# Altium PCB CircleValve.PcbDoc
Units mm, origin at the board's own origin, x right, y up, seen from the top; angles counter-clockwise.
Board outline 54 x 54 mm, 2 copper layers (Top Layer, Bottom Layer); 53 components, 64 nets, 229 pads, 73 vias.
Unrouted connection lines stored in the file: 1.
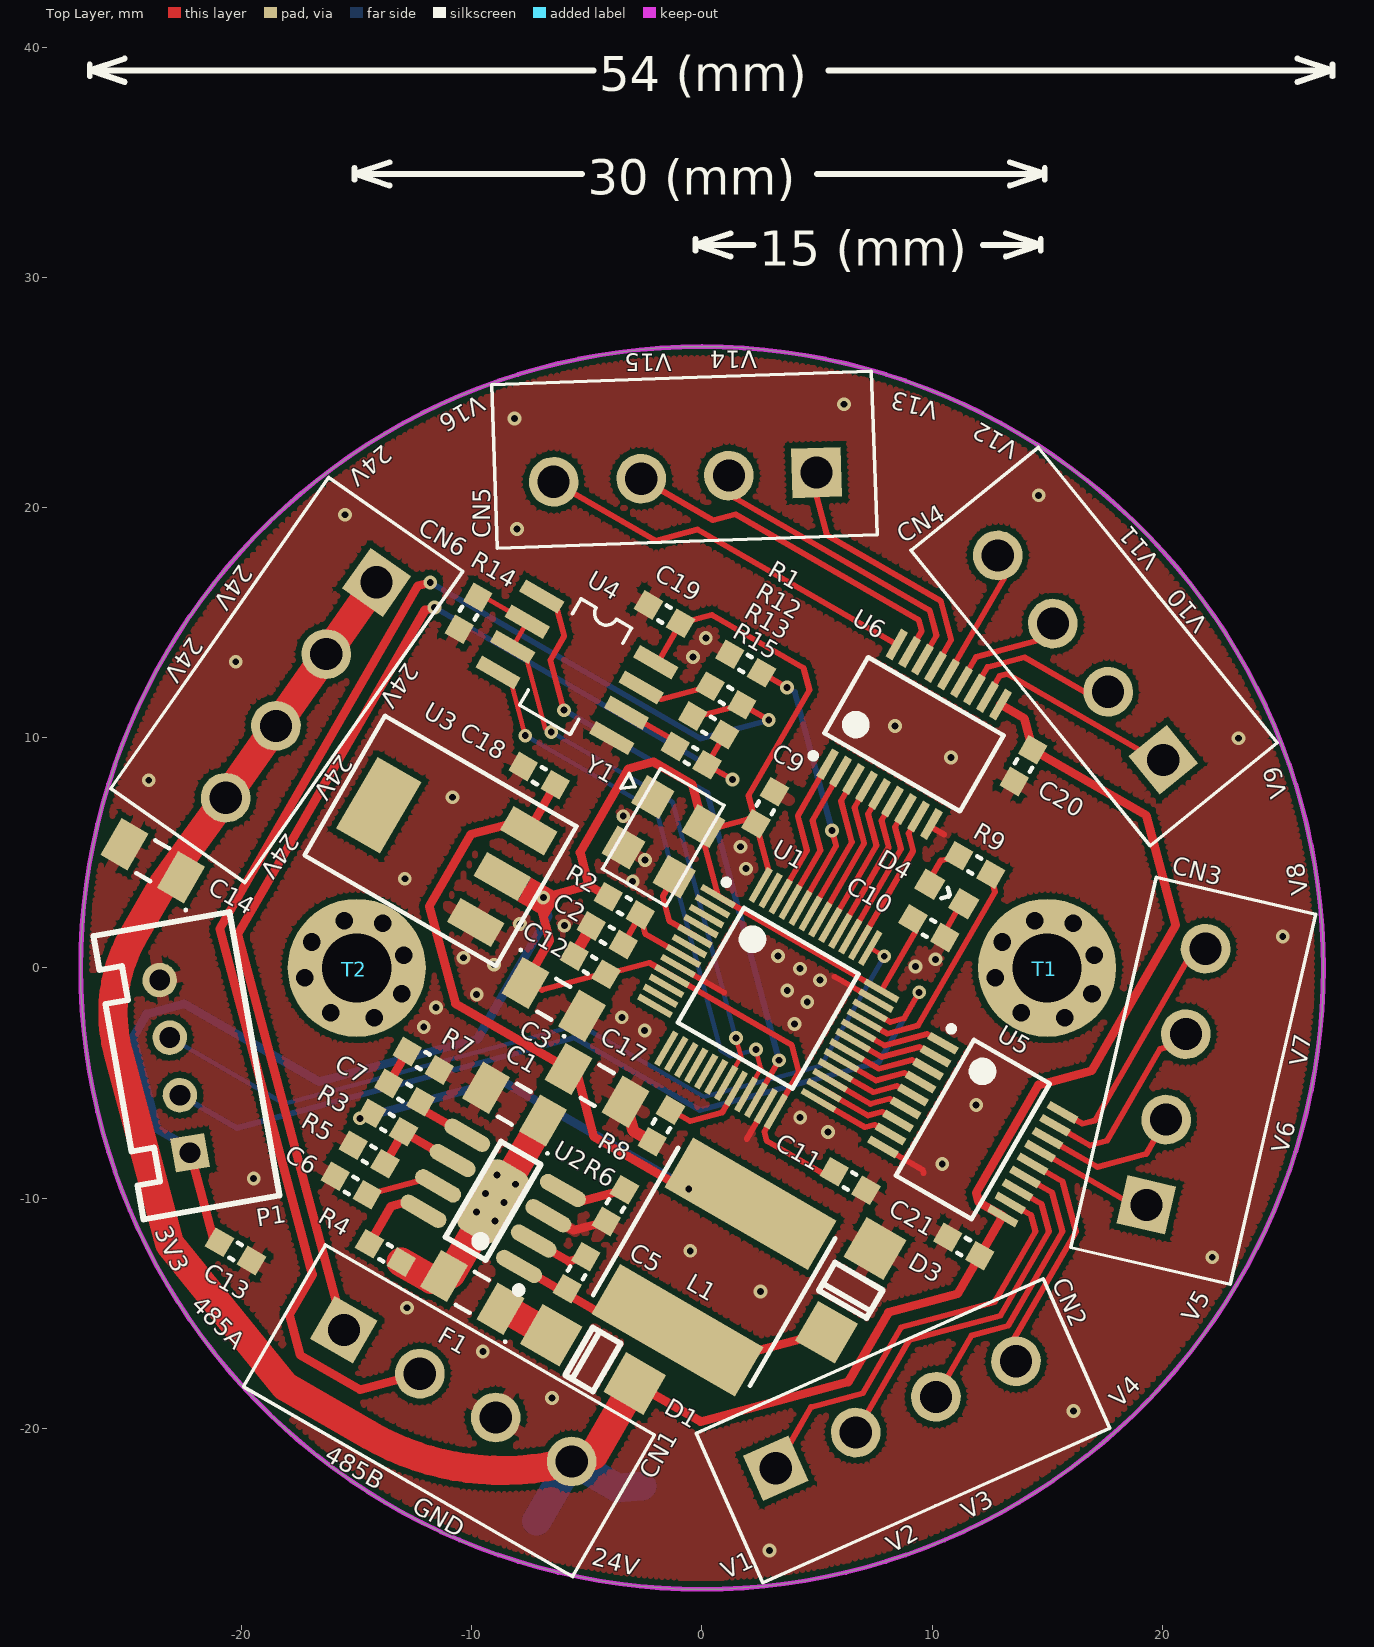
[diagram p0: Top Layer view]
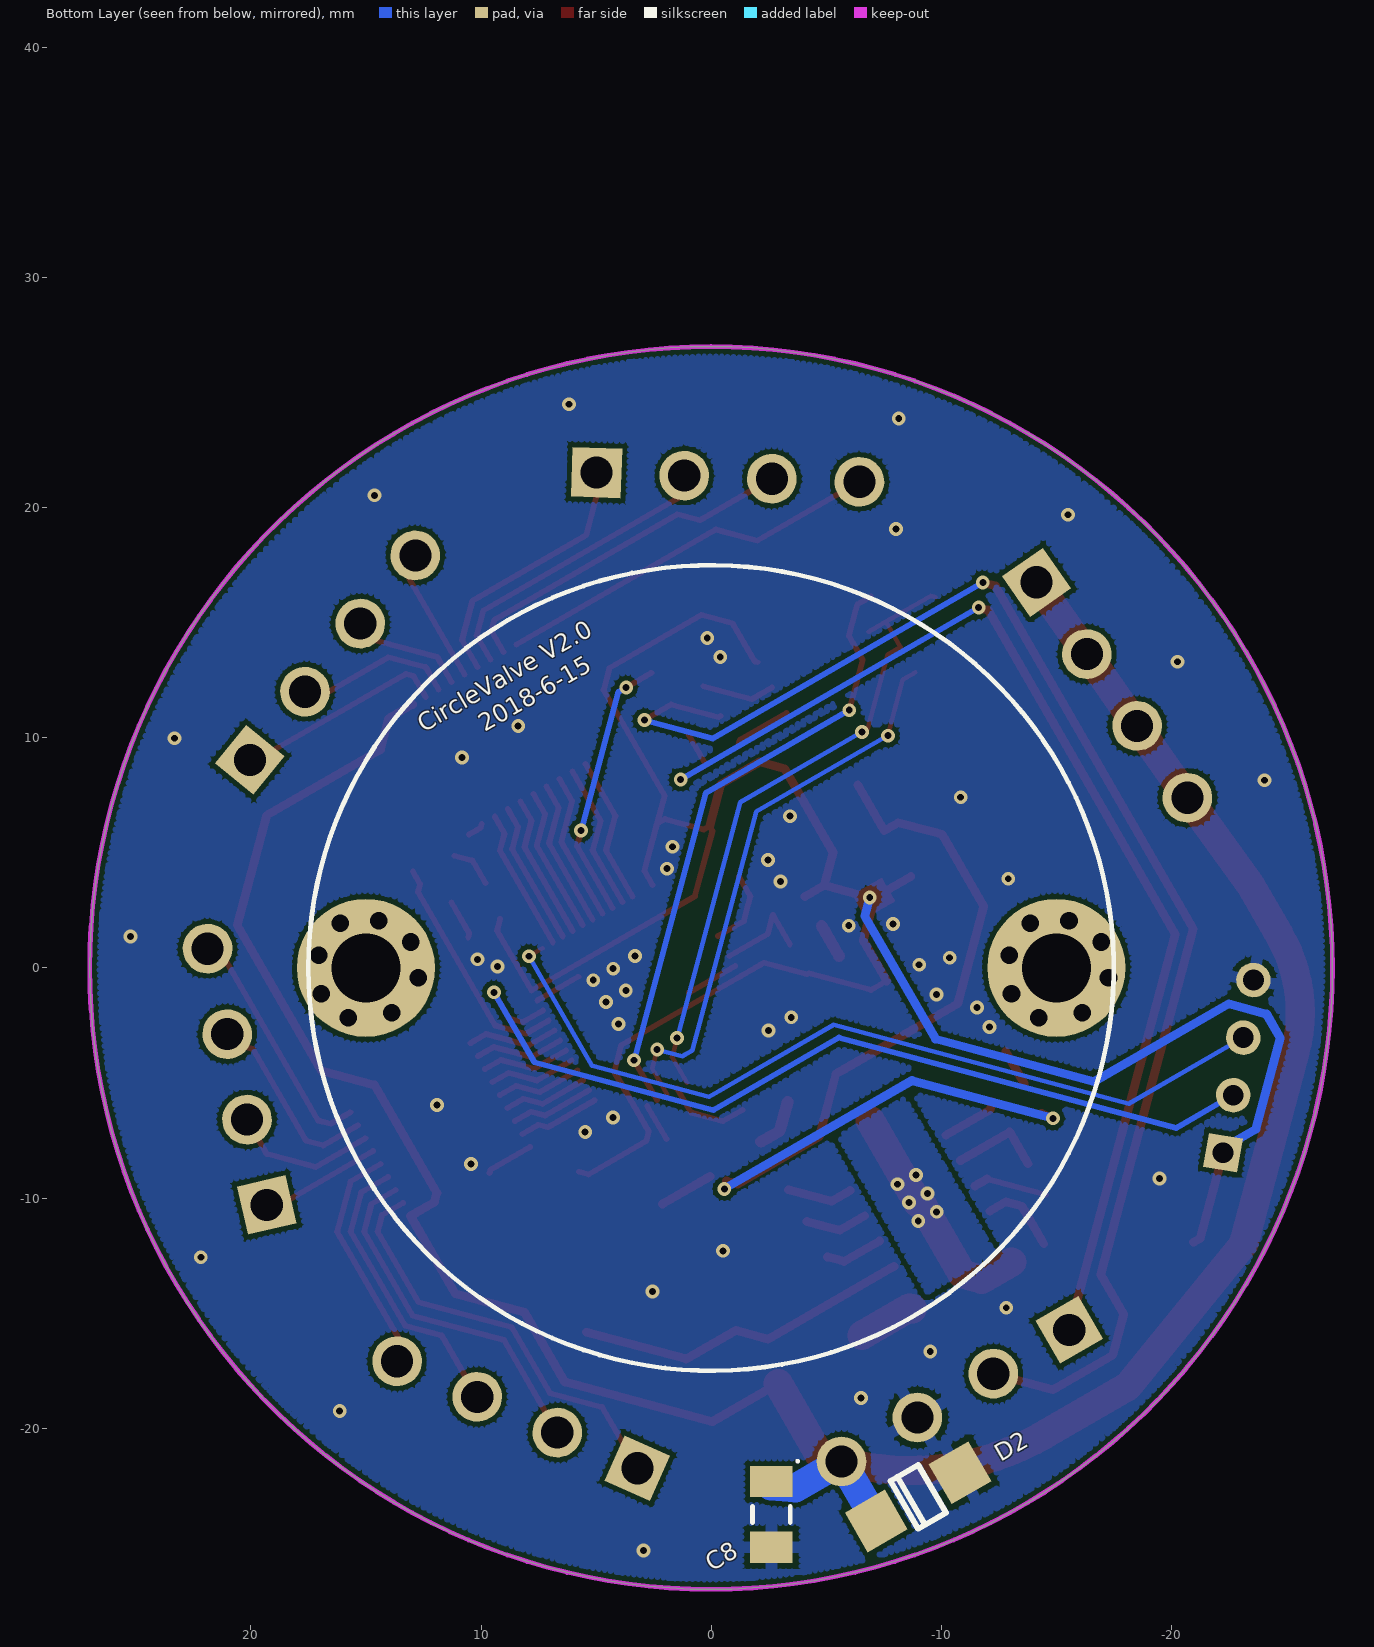
[diagram p1: Bottom Layer view, seen from below]

## Layer stack, top to bottom
Top Layer: signal copper 0.0356
Dielectric: dielectric 0.32, FR-4, Dk 4.8
Bottom Layer: signal copper 0.0356

## Board outline
-26.997,-0.003 ccw(c0.003,-0.003) 0.003,-27.003 ccw(c0.003,-0.003) 27.003,-0.003 ccw(c0.003,-0.003) 0.003,26.997 ccw(c0.003,-0.003)

## Design rules (kind name [scope] priority, off if disabled: settings)
Clearance [All] p1: gap=0.203
ComponentClearance [All] p1 off: gap=0.254 collisioncheckmode=3 verticalgap=0.254 showdistances=FALSE
PlaneConnect [All] p1: planeconnectstyle=Direct reliefexpansion=0.508 reliefentries=4 reliefconductorwidth=0.254 reliefairgap=0.254
PolygonConnect PolygonConnect_1 [isvia] p1: connectstyle=Direct reliefconductorwidth=0.254 reliefentries=4 polygonreliefangle="90 Angle" airgapwidth=0.254
PolygonConnect [All] p2: connectstyle=Relief reliefconductorwidth=0.508 reliefentries=4 polygonreliefangle="90 Angle" airgapwidth=0.254
RoutingVias [All] p1: holewidth=0.711 width=1.27 viastyle="Through Hole" minholewidth=0.711 minwidth=1.27 maxholewidth=0.711 maxwidth=1.27
SolderMaskExpansion [All] p1: expansion=0.102
Width [All] p1: maxlimit=2.54 minlimit=0.152 preferedwidth=0.254
26 further rules are at their usual default settings.

## Classes and differential pairs
component class Power: C1 C3 C5 C6 C7 C8 C14 C17 C18 C19 CN1 D1 D2 D3 F1 L1 R3 R4 R5 R6 R7 U2 U3
component class "Surface V2.0": C20 C21 CN2 CN3 CN4 CN5 CN6 U5 U6
component class CircleValve: C2 C9 C10 C11 C12 C13 D4 P1 R1 R2 R8 R9 R12 R13 R14 R15 T1 T2 U1 U4 Y1

## Components (designator, comment, footprint, x,y, rotation, side; value= is the part's Value field where it differs from the comment)
C1 "10uf 50V" C1206 -8.147,-5.921 r150 top
C2 "100nF" C0603 -4.112,1.42 r150 top
C3 "10uF 16V" C1206 -4.559,-5.106 r330 top
C5 "100nF" C0603 -5.451,-13.251 r240 top
C6 "100nF" C0603 -15.24,-9.456 r150 top
C7 "100nF" C0603 -12.911,-5.422 r150 top
C8 "10uF 50V" C1206 -2.62,-23.748 r270 bottom
C9 "100nF" C0603 2.751,6.955 r240 top
C10 "100nF" C0603 9.862,1.723 r150 top
C11 "100nF" C0603 6.437,-9.26 r150 top
C12 "100nF" C0603 -4.862,0.121 r330 top
C13 "100nF" C0603 -20.269,-12.317 r150 top
C14 "10uF 50V" C1206 -23.865,4.655 r150 top
C17 "10uF 16V" C1206 -6.44,-1.364 r330 top
C18 "100nF" C0603 -7.067,8.351 r330 top
C19 "100nF" C0603 -1.628,15.372 r330 top
C20 "100nF" C0603 13.972,8.791 r60 top
C21 "100nF" C0603 11.373,-12.11 r330 top
CN1 "CON_3.81_4P_DECA_ME040_381" ME040_381_4P_VC-1 -10.61,-18.586 r330 top locked
CN2 "CON_3.81_4P_DECA_ME040_381" ME040_381_4P_VC-1 8.426,-19.415 r24 top locked
CN3 "CON_3.81_4P_DECA_ME040_381" ME040_381_4P_VC-1 20.597,-4.734 r77 top locked
CN4 "CON_3.81_4P_DECA_ME040_381" ME040_381_4P_VC-1 16.448,13.481 r129 top locked
CN5 "CON_3.81_4P_DECA_ME040_381" ME040_381_4P_VC-1 -0.733,21.322 r182 top locked
CN6 "CON_3.81_4P_DECA_ME040_381" ME040_381_4P_VC-1 -17.417,12.075 r235 top locked
D1 "SK54" LC-SMA(DO-214AC)_S3 -4.736,-17.012 r330 top
D2 "SMAJ30CA" LC-SMA(DO-214AC)_S3 -8.993,-22.984 r150 bottom
D3 "SK54" LC-SMA(DO-214AC)_S3 6.465,-14.011 r60 top
D4 "LED" LED_M 10.635,3.212 r330 top
F1 "3A 32V" C1206 -9.982,-14.099 r150 top
L1 "10uH" L_SOP74 -1.065,-15.754 r60 top
P1 "Header 4" Header4-2.54mm -22.241,-8.032 r100 top locked
R1 "10K" R0603 1.823,13.149 r150 top
R2 "10K" R0603 -3.302,2.771 r330 top
R3 "52.3k 1%" R0603 -13.733,-6.795 r150 top
R4 "100k" R0603 -13.683,-12.309 r330 top
R5 "10k 1%" R0603 -14.39,-8.033 r330 top
R6 "200k" R0603 -3.838,-10.256 r60 top
R7 "10k" R0603 -12.183,-4.11 r150 top
R8 "10K" R0603 -1.838,-6.792 r60 top
R9 "1k" R0603 11.781,4.397 r150 top
R12 "4R7" R0603 0.967,11.767 r150 top
R13 "120R" R0603 0.361,10.616 r330 top
R14 "10K" R0603 -10.223,15.485 r60 top
R15 "4R7" R0603 -0.545,9.147 r150 top
T1 "TP" 定位孔3mm 15,0 r330 top
T2 "TP" 定位孔3mm -15,0 r330 top
U1 "STM32F103C8T6" LQFP-48_7X7X05P 2.881,-1.318 r330 top locked
U2 "AOZ1284" LC-SOP-8_150mil -9.072,-10.121 r60 top
U3 "1117M3 330" LT1117 -14.043,7.067 r60 top
U4 "SP3485" SO8 -6.958,16.14 r240 top
U5 "TBD62083AFNG" SSOP18-0.65 11.768,-7.027 r330 top
U6 "TBD62083AFNG" SSOP18-0.65 9.215,10.151 r60 top
Y1 "SG5032CAN-8M" XTAL-4P-5*3MM -1.671,5.697 r240 top

## Footprints (in the part's own frame and the unit in brackets; to place one, negate y for a bottom-side part, rotate by r counter-clockwise, add the part's x,y. Pads: shape width x height; smd on the part's side, far side on the other; paste and mask are expansions set on the pad)
C0603 [mm] "Chip Capacitor, 2-Leads, Body 1.85x0.88mm, IPC Medium Density"
  rect 0.95x0.95 smd: 1(-0.8,0) 2(0.8,0)
  silkscreen extent -0.1,-0.37 0.1,0.38, body extent -0.95,-0.48 0.95,0.48, height 0.6
C1206 [mm] "Chip Capacitor, 2-Leads, Body 3.20x1.60mm, IPC Medium Density"
  rect 1.35x1.85 smd: 1(-1.425,0) 2(1.425,0)
  silkscreen extent -2.36,-0.82 0.35,1.19, body extent -1.7,-0.9 1.7,0.9, height 1.8
Header4-2.54mm [mm]
  rect 1.5x1.5 hole 0.9: 1(0,0)
  round 1.5 hole 0.9: 2(2.54,0) 3(5.08,0) 4(7.62,0)
  silkscreen extent -2.5,-3.5 10,2.5
L_SOP74 [mm]
  rect 2.5x7.2 smd: 1(0,0) 2(6.35,0)
  silkscreen extent -0.51,-3.94 6.89,3.94
LC-SMA(DO-214AC)_S3 [mm]
  rect 2x2 smd: 1(2.1,0) 2(-2.1,0)
  silkscreen extent -0.7,-1.2 0.7,1.2
LC-SOP-8_150mil [mm]
  oval 0.7x2.2 smd: 1(-1.905,-2.4) 2(-0.635,-2.4) 3(0.635,-2.4) 4(1.905,-2.4) 5(1.905,2.4) 6(0.635,2.4) 7(-0.635,2.4) 8(-1.905,2.4)
  rrect50% 3.5x2 smd: 9(-0.025,0)
  silkscreen extent -2.95,-3.05 2.4,1, body extent -2.5,-3.1 2.5,3.1, height 1.75
LED_M [mm]
  rect 1x1 smd: 1(-0.85,0) 2(0.85,0)
  silkscreen extent -0.1,-0.28 0.13,0.25
LQFP-48_7X7X05P [mm] "For STM32F103C8T6 V2.0"
  rect 1.65x0.28 smd: 1(-4.1,2.75) 2(-4.1,2.25) 3(-4.1,1.75) 4(-4.1,1.25) 5(-4.1,0.75) 6(-4.1,0.25) 7(-4.1,-0.25) 8(-4.1,-0.75) 9(-4.1,-1.25) 10(-4.1,-1.75) 11(-4.1,-2.25) 12(-4.1,-2.75) 25(4.1,-2.75) 26(4.1,-2.25) 27(4.1,-1.75) 28(4.1,-1.25) 29(4.1,-0.75) 30(4.1,-0.25) 31(4.1,0.25) 32(4.1,0.75) 33(4.1,1.25) 34(4.1,1.75) 35(4.1,2.25) 36(4.1,2.75)
  rect 0.28x1.65 smd: 13(-2.75,-4.1) 14(-2.25,-4.1) 15(-1.75,-4.1) 16(-1.25,-4.1) 17(-0.75,-4.1) 18(-0.25,-4.1) 19(0.25,-4.1) 20(0.75,-4.1) 21(1.25,-4.1) 22(1.75,-4.1) 23(2.25,-4.1) 24(2.75,-4.1) 37(2.75,4.1) 38(2.25,4.1) 39(1.75,4.1) 40(1.25,4.1) 41(0.75,4.1) 42(0.25,4.1) 43(-0.25,4.1) 44(-0.75,4.1) 45(-1.25,4.1) 46(-1.75,4.1) 47(-2.25,4.1) 48(-2.75,4.1)
  silkscreen extent -4.22,-2.88 2.88,3.57, body extent -3.5,-3.5 3.5,3.5, height 1.6
LT1117 [mm]
  rect 1.2x2.2 smd: 1(-2.3,-6.2) 2(0,-6.2) 3(2.3,-6.2)
  rect 3.6x2.2 smd: 4(0,0)
  silkscreen extent -3.5,-7.9 3.5,1.7
ME040_381_4P_VC-1 [mil] "垂直安装"
  rect 85x85 hole 55 mask+3: 1(-225,0)
  round 85 hole 55 mask+3: 2(-75,0) 3(75,0) 4(225,0)
  silkscreen extent -325,-170 325,110, body extent -323,-219 323,190, height 876
R0603 [mm]
  rect 0.95x0.95 smd: 1(-0.825,-0.1) 2(0.775,-0.1)
  silkscreen extent -0.13,-0.48 0.08,0.28, body extent -0.98,-0.57 0.92,0.38, height 0.4
SO8 [mil]
  rect 24x76 smd: 1(0,0) 2(50,0) 3(100,0) 4(150,0) 5(150,225) 6(100,225) 7(50,225) 8(0,225)
  silkscreen extent -30,60 180,160, body extent -32,56 182,161, height 79
SSOP18-0.65 [mm] "For TBD62083AFNG \ TBD62084AFNG"
  rect 1.4x0.35 smd: 1(-3,2.6) 2(-3,1.95) 3(-3,1.3) 4(-3,0.65) 5(-3,0) 6(-3,-0.65) 7(-3,-1.3) 8(-3,-1.95) 9(-3,-2.6) 10(3,-2.6) 11(3,-1.95) 12(3,-1.3) 13(3,-0.65) 14(3,0) 15(3,0.65) 16(3,1.3) 17(3,1.95) 18(3,2.6)
  silkscreen extent -3.12,-3.4 1.9,3.45, body extent -2.25,-3.4 2.25,3.4, height 1.55
XTAL-4P-5*3MM [mm]
  rect 1.4x1.4 smd: 1(-1.27,-1.27) 2(1.27,-1.27) 3(1.27,1.27) 4(-1.27,1.27)
  silkscreen extent -2.5,-2.67 2.54,1.6, body extent -2.58,-1.68 2.62,1.68, height 1.3
定位孔3mm [mil] "3*6mm"
  round 30 hole 30: 1(0,88.58) 2(88.58,0) 3(0,-88.58) 4(-88.58,0) 5(59.06,59.06) 6(68.9,-59.06) 7(-68.9,-59.06) 8(-59.06,59.05)
  round 236.22 hole 118.11: 9(0,0)

## Part data
C1 C17: library part CAP1
C2 C3 C5 C6 C7 C9 C10 C11 C12 C13 C18 C19 C20 C21: library part CAP
C8 C14: library part "Cap Pol1", "Polarized Capacitor (Radial)"
CN1 CN2 CN3 CN4 CN5 CN6: "DECA connector,3.81mm,1*4P,180度"
D1 D3: library part D, "1N4148"
D2: library part SMBJ, "TVS"
F1: library part FUSE
L1: library part 差模电感
P1: "Header, 4-Pin"
R1 R2 R3 R4 R5 R6 R7 R8: library part RES
R9 R12 R13 R14 R15: library part R, "标贴电阻"
U3: library part LT1117
U4: library part RS485
U5 U6: library part ULN2803, "达林顿晶体管阵列"
Y1: library part XTAL_POWER

## Via types
v1: diameter 0.6, hole 0.3, Top Layer to Bottom Layer, 73 vias

## Nets (pads, with @x,y where several pads share a name; then routed paths per layer and width w, separated by ;. In a path a pad name is that pad's centre, name@x,y a point inside that pad or via, vN(x,y) a via of type N, cw(c..) or ccw(c..) an arc to the next point about the centre after c; other vN are vias at no path point)
3V3: C9.2 C10.2 C11.2 C12.2 C13.2 C17.1 C19.2 P1.1 R2.1 U1.1 U1.9 U1.24 U1.36 U1.48 U3.2 U4.8 Y1.4 | length 110.1
  Top Layer w0.254: C17.1@-7.624,-0.565 -6.946,-0.956 -4.248,-0.233 C12.2 -2.29,0.224 U1.9 3.902,-3.351 4.213,-4.512 U1.24 2.713,-7.11 2.823,-7.52 5.334,-8.97 C11.2 ; U4.8 -1.892,13.314 C19.2 0.431,15.338 4.415,13.038 4.671,12.082 2.021,7.492 C9.2 ; U1.48 2.9,4.213 C9.2 ; C10.2 9.307,1.611 U1.36 U1.1 -0.056,5.954 Y1.4 0.324,6.012 2.004,6.462 C9.2
  Top Layer w0.381: P1.1 -21.244,-11.754 C13.2 ; U3.2 v1@-7.115,3.067 ; C17.1@-7.624,-0.565 -6.612,1.189 v1@-7.115,3.067 ; R2.1 -4.911,3.585 ; Y1.4 -0.423,7.979 -2.103,8.949 -3.196,8.656 -5.296,5.019 -4.911,3.585 ; v1@-7.115,3.067 -7.029,3.017 v1(-6.892,3.054) -4.911,3.585
  Bottom Layer w0.381: P1.1 -22.305,-7.793 -23.669,-7.005 -24.731,-3.044 -24.131,-2.004 -22.491,-1.565 -16.65,-4.938 -9.754,-3.09 -6.675,2.243 v1(-6.892,3.054)
5V: C3.1 C18.2 L1.2 R3.2 U3.3 | length 45.2
  Top Layer w0.381: v1(-14.854,-6.536) R3.2 ; C18.2 U3.3 -8.13,6.309 -10.043,5.797 -11.843,2.679 -10.708,-1.556 C3.1 -5.425,-4.606 -4.693,-7.338 -1.143,-9.388 L1.2@-0.664,-9.26 ; L1.2@0.053,-9.067 L1.2
  Bottom Layer w0.381: v1(-14.854,-6.536) -8.726,-4.894 v1(-0.573,-9.601)
24V: C8.1 C14.1 C20.2 C21.2 CN1.4 CN6.1 CN6.2 CN6.3 CN6.4 D1.1 D2.2 U5.10 U6.10 | length 115.2
  Top Layer w0.381: D1.1 -0.06,-19.712 6.361,-17.992 8.111,-14.961 11.116,-14.156 C21.2 U5.10 12.027,-10.178 11.917,-9.768 14.617,-5.092 16.939,-4.47 20.589,1.852 19.308,6.633 C20.2 14.006,10.85 U6.10
  Top Layer w1.27: CN6.1 CN6.2 CN6.3 CN6.4 -23.436,3.599 -24.699,1.412 ccw(c-18.898,-1.937) -25.368,-3.671 -23.141,-11.981 -18.113,-18.181 -14.469,-20.284 ccw(c-8.665,-10.231) CN1.4 -4.725,-21.193 D1.1
  Bottom Layer w1.27: D2.2 -5.681,-21.449 CN1.4 -3.657,-22.6 C8.1@-2.605,-22.518
485A: CN1.1 R13.2 R15.1 | length 52.2
  Top Layer w0.254: R13.2 R15.1 v1(1.323,8.183)
  Top Layer w0.381: CN1.1 -20.166,1.463 -12.033,15.549 v1(-11.624,15.658)
  Bottom Layer w0.254: v1(-11.624,15.658) v1(1.323,8.183)
485B: CN1.2 R12.1 R13.1 | length 63
  Top Layer w0.254: R13.1 -0.317,10.892 R12.1 v1(2.901,10.766)
  Top Layer w0.381: CN1.2 -14.855,-18.329 -17.449,-16.832 -17.925,-15.056 -16.925,-13.324 -20.951,1.702 -12.351,16.598 v1(-11.805,16.745)
  Bottom Layer w0.254: v1(-11.805,16.745) -0.07,9.97 v1(2.901,10.766)
AIN0: U1.10
AIN1: U1.11
AIN2: U1.12
GND: C1.2 C2.2 C3.2 C6.2 C8.2 C9.1 C10.1 C11.1 C12.1 C13.1 C14.2 C17.2 C18.1 C19.1 C20.1 C21.1 CN1.3 D2.1 D3.1 D4.2 P1.4 R1.2 R5.1 R6.1 R7.1 R8.1 R14.1 U1.8 U1.23 U1.35 U1.47 U2.3 U3.1 U4.5 U5.9 U6.9 Y1.2 | length 17.2
  Top Layer w0.254: U1.8 0.946,-1.067 0.957,-1.064 ; 1.947,-7.437 U1.23 ; 5.759,-0.382 U1.35 ; U5.9 9.59,-8.771 9.626,-8.908 ; U6.9 10.01,6.092 10.524,5.795 ; C10.1 10.51,1.494 D4.2@11.285,2.837
  Top Layer w0.381: U2.3 -5.585,-11.402 R6.1
  Top Layer w0.508: C12.1 C2.2 ; C3.2 -2.987,-7.082 R8.1
  other v1: 2.941,-25.315 16.141,-19.251 -6.511,-18.685 -9.522,-16.674 -12.822,-14.769 2.547,-14.058 22.175,-12.573 -0.51,-12.293 -19.478,-9.146 10.439,-8.527 5.474,-7.127 4.267,-6.506 11.916,-5.957 -2.49,-2.721 -12.09,-2.565 4.024,-2.44 -3.482,-2.148 -11.557,-1.727 4.574,-1.487 -9.788,-1.163 3.708,-0.987 5.124,-0.535 4.257,-0.035 9.281,0.067 -9.038,0.136 10.151,0.373 -10.364,0.44 3.305,0.515 25.235,1.364 -5.98,1.834 -7.902,1.905 -3.01,3.756 -12.911,3.873 1.917,4.312 -2.469,4.692 1.678,5.265 -3.422,6.593 -10.842,7.413 -24.04,8.153 10.825,9.141 23.317,9.977 8.385,10.515 -20.259,13.302 -0.396,13.506 0.169,14.335 -8.036,19.072 -15.51,19.692 14.632,20.534 -8.151,23.873 6.178,24.491
NetC5_1: C5.1 U2.2 | length 2.5
  Top Layer w0.381: U2.2 -5.782,-12.754 C5.1
NetC5_2: C5.2 D3.2 L1.1 U2.1 | length 14.7
  Top Layer w0.381: U2.1 -2.472,-16.131 L1.1 1.078,-16.992 D3.2
NetC6_1: C6.1 U2.7 | length 3.3
  Top Layer w0.254: C6.1 U2.7@-11.989,-9.17
  Top Layer w0.381: U2.7@-11.989,-9.17 U2.7
NetC7_1: C7.1 U2.5 | length 2.6
  Top Layer w0.381: C7.1 -12.129,-6.157 U2.5
NetC7_2: C7.2 R7.2 | length 1.6
  Top Layer w0.381: C7.2 R7.2
NetD1_2: D1.2 F1.1 | length 2.5
  Top Layer w1.27: F1.1 -8.612,-14.775 D1.2
NetD4_1: D4.1 R9.2 | length 1.9
  Top Layer w0.254: D4.1@9.812,3.686 10.375,4.661 R9.2
NetR1_1: R1.1 U1.44 | length 11.7
  Top Layer w0.254: R1.1 v1(3.692,12.185) ; U1.44 5.832,5.292 v1(5.649,5.975)
  Bottom Layer w0.254: v1(3.692,12.185) 4.038,11.985 v1(5.649,5.975)
NetR3_1: R3.1 R5.2 U2.6 | length 4.1
  Top Layer w0.381: R5.2 R3.1 -12.963,-7.142 U2.6
NetR4_1: R4.1 U2.8 | length 3.4
  Top Layer w0.381: R4.1 -13.51,-10.359 -12.8,-10.169 U2.8
NetR6_2: R6.2 U2.4 | length 2.9
  Top Layer w0.381: U2.4 -5.235,-10.137 R6.2
NetR8_2: R8.2 U1.20 | length 3.6
  Top Layer w0.254: R8.2 -0.519,-6.659 0.881,-6.283 U1.20
NetR12_2: R12.2 U4.7 | length 3.2
  Top Layer w0.254: U4.7 -1.764,11.675 R12.2
NetR15_2: R15.2 U4.6 | length 2.6
  Top Layer w0.254: U4.6 -1.243,9.908 R15.2
OSCIN: U1.5 Y1.3 | length 3.4
  Top Layer w0.254: Y1.3 -1.706,3.097 -1.42,2.031 U1.5
PA8: U1.29 U5.4 | length 3.8
  Top Layer w0.254: U1.29 7.569,-4.891 8.799,-4.562 U5.4
PA9: U1.30 U5.3 | length 3.9
  Top Layer w0.254: U1.30 7.693,-4.385 9.127,-4.001 U5.3
PA10: U1.31 U5.2 | length 3.9
  Top Layer w0.254: U1.31 7.81,-3.875 9.449,-3.436 U5.2
PA11: U1.32 U5.1 | length 4
  Top Layer w0.254: U1.32 7.933,-3.369 9.777,-2.875 U5.1
PA12: R9.1 U1.33 | length 10.2
  Top Layer w0.254: U1.33 8.056,-2.863 9.39,-2.505 12.737,3.291 12.643,3.64 R9.1@12.956,4.181
PA13_JTMS: P1.2 U1.34 | length 38.8
  Top Layer w0.254: U1.34 8.179,-2.356 8.784,-2.194 v1(9.438,-1.062)
  Bottom Layer w0.254: P1.2 -20.211,-6.957 -5.555,-3.03 -0.099,-6.18 7.688,-4.093 v1(9.438,-1.062)
PA14_JTCK: P1.3 U1.37 | length 36.7
  Top Layer w0.203: U1.37 v1(7.919,0.507)
  Bottom Layer w0.203: P1.3 -18.144,-5.904 -5.326,-2.469 0.105,-5.605 5.174,-4.247 v1(7.919,0.507)
PA15: U1.38 U6.8 | length 6.2
  Top Layer w0.254: U1.38 9.18,5.091 8.978,5.842 U6.8
PB1_485EN: R14.2 U1.19 U4.2 U4.3 | length 27.7
  Top Layer w0.203: R14.2 -9.537,16.163 U4.2 ; U4.2@-6.839,14.605 U4.2 ; v1(-6.55,10.246) -6.81,10.396 -7.673,13.62 U4.3 U4.2 ; U1.19 1.698,-3.868 v1(1.478,-3.049)
  Bottom Layer w0.203: v1(-6.55,10.246) -1.267,7.196 v1(1.478,-3.049)
PB3: U1.39 U6.7 | length 6.3
  Top Layer w0.254: U1.39 8.647,5.168 8.391,6.124 U6.7
PB4: U1.40 U6.6 | length 6.4
  Top Layer w0.254: U1.40 8.114,5.245 7.803,6.406 U6.6
PB5: U1.41 U6.5 | length 6.4
  Top Layer w0.254: U1.41 7.581,5.321 7.215,6.687 U6.5
PB6: U1.42 U6.4 | length 6.5
  Top Layer w0.254: U1.42 7.048,5.398 6.627,6.969 U6.4
PB7: U1.43 U6.3 | length 6.5
  Top Layer w0.254: U1.43 6.515,5.475 6.039,7.251 U6.3
PB8: U1.45 U6.2 | length 6.4
  Top Layer w0.254: U1.45 5.149,5.109 4.801,6.407 U6.2
PB9: U1.46 U6.1 | length 6.5
  Top Layer w0.254: U1.46 4.566,5.099 4.163,6.602 U6.1
PB10/U3TX: U1.21 U4.4 | length 24.3
  Top Layer w0.203: U4.4 -8.334,12.535 v1(-7.679,10.09) ; U1.21 2.564,-4.368 v1(2.344,-3.549)
  Bottom Layer w0.203: v1(-7.679,10.09) -1.964,6.79 0.818,-3.592 1.251,-3.842 v1(2.344,-3.549)
PB11/U3RX: U1.22 U4.1 | length 26.8
  Top Layer w0.254: U4.1 -6.352,15.79 -5.986,14.424 -6.586,13.385 v1(-6,11.199) ; U1.22 v1(3.347,-4.012)
  Bottom Layer w0.254: v1(-6,11.199) 0.236,7.599 v1(3.347,-4.012)
PB12: U1.25 U5.8 | length 3.6
  Top Layer w0.254: U1.25 7.089,-6.923 7.499,-6.814 U5.8
PB13: U1.26 U5.7 | length 3.6
  Top Layer w0.254: U1.26 7.212,-6.417 7.827,-6.252 U5.7
PB14: U1.27 U5.6 | length 3.7
  Top Layer w0.254: U1.27 7.329,-5.907 8.149,-5.688 U5.6
PB15: U1.28 U5.5 | length 3.8
  Top Layer w0.254: U1.28 7.452,-5.401 8.477,-5.127 U5.5
RESET: C2.1 R2.2 U1.7 | length 4.2
  Top Layer w0.254: C2.1 R2.2 -2.462,1.477 U1.7
V1: CN2.1 U5.11 | length 18.3
  Top Layer w0.254: CN2.1 4.737,-19.086 7.003,-18.479 8.653,-15.621 12.719,-14.531 14.493,-11.459 14.3,-10.74 U5.11
V2: CN2.2 U5.12 | length 15.4
  Top Layer w0.254: CN2.2 9.005,-16.172 12.972,-15.109 15.079,-11.46 14.755,-10.252 U5.12
V3: CN2.3 U5.13 | length 12.6
  Top Layer w0.254: CN2.3 11.705,-15.974 13.307,-15.545 15.665,-11.461 15.21,-9.764 U5.13
V4: CN2.4 U5.14 | length 10.2
  Top Layer w0.254: CN2.4 13.442,-16.327 16.251,-11.462 15.665,-9.277 U5.14
V5: CN3.1 U5.15 | length 5.3
  Top Layer w0.254: U5.15 18.922,-10.407 CN3.1
V6: CN3.2 U5.16 | length 6.4
  Top Layer w0.254: U5.16 17.181,-8.651 19.308,-8.081 CN3.2
V7: CN3.3 U5.17 | length 8.5
  Top Layer w0.254: U5.17 16.856,-7.713 17.608,-7.511 19.908,-3.528 20.786,-3.292 CN3.3
V8: CN3.4 U5.18 | length 10.6
  Top Layer w0.254: U5.18 16.532,-6.775 17.078,-6.628 21.296,0.678 CN3.4
V9: CN4.1 U6.11 | length 9.2
  Top Layer w0.254: U6.11 12.928,12.684 13.27,12.775 19.837,8.984 CN4.1
V10: CN4.2 U6.12 | length 6.9
  Top Layer w0.254: U6.12 12.4,13.068 14.014,13.501 16.941,11.811 CN4.2
V11: CN4.3 U6.13 | length 5.1
  Top Layer w0.254: U6.13 11.903,13.507 14.869,14.302 CN4.3
V12: CN4.4 U6.14 | length 5.9
  Top Layer w0.254: U6.14 13.121,16.917 CN4.4
V13: CN5.1 U6.15 | length 11.7
  Top Layer w0.254: CN5.1 4.791,21.196 5.433,18.801 10.369,15.951 10.827,14.244 U6.15
V14: CN5.2 U6.16 | length 13.1
  Top Layer w0.254: CN5.2 1.431,20.419 9.896,15.532 10.189,14.439 U6.16
V15: CN5.3 U6.17 | length 15.4
  Top Layer w0.254: CN5.3 0.486,19.452 1.455,19.712 9.423,15.112 9.551,14.634 U6.17
V16: CN5.4 U6.18 | length 17
  Top Layer w0.254: CN5.4 -2.012,18.563 -0.197,19.05 U6.18
VCC: C1.1 F1.2 R4.2 U2.9 | length 10.2
  Top Layer w1.27: R4.2 -11.763,-13.533 F1.2 -10.909,-13.304 U2.9 ; U2.9@-8.976,-10.206 C1.1
  other v1: -9,-11 -9.8,-10.6 -8.6,-10.2 -9.4,-9.8 -8.1,-9.4 -8.9,-9
pads on no net: T1.1 T1.2 T1.3 T1.4 T1.5 T1.6 T1.7 T1.8 T1.9 T2.1 T2.2 T2.3 T2.4 T2.5 T2.6 T2.7 T2.8 T2.9 U1.2 U1.3 U1.4 U1.6 U1.13 U1.14 U1.15 U1.16 U1.17 U1.18 U3.4 Y1.1

## Polygon pours and split planes (outlines as drawn)
VCC on Bottom Layer "Top Layer-No Net" (hatched 90Degree grid 0.254 track 0.254, remove dead copper, pour order 9): -8.255,-5.4 -5.4,-7.042 -9.393,-14.1 -12.3,-12.379
GND on Bottom Layer "Top Layer-No Net2" (hatched 90Degree grid 0.254 track 0.254, remove dead copper, pour order 11): -26.997,-0.003 ccw(c0.003,-0.003) 0.003,-27.003 ccw(c0.003,-0.003) 27.003,-0.003 ccw(c0.003,-0.003) 0.003,26.997 ccw(c0.003,-0.003)
GND on Top Layer "Top Layer-No Net1" (hatched 90Degree grid 0.254 track 0.254, remove dead copper, pour order 7): -23.43,13.569 ccw(c-0.048,0.069) -13.548,-23.314 ccw(c-0.048,0.069) 23.335,-13.431 ccw(c-0.048,0.069) 13.452,23.451 ccw(c-0.048,0.069)

## Keep-outs
Keep-Out Layer:
  circle w0.203: c0.003,-0.003 r27

## Other copper
Top Layer:
  region net 3V3: -8.021,2.898 -6.722,2.148 -6.122,3.187 -7.421,3.937

## Silkscreen, mask and mechanical layers (free items; w line width, h text height)
Top Overlay:
  lines w0.254: -26.604,38.746 -26.604,39.254 ; -25.08,38.492 -26.604,39 ; -25.08,39.508 -26.604,39 ; -15.104,34.246 -15.104,34.754 ; -13.58,33.992 -15.104,34.5 ; -13.58,35.008 -15.104,34.5 ; -5.208,34.5 -15.104,34.5 ; -4.708,39 -26.604,39 ; -0.277,31.16 -0.277,31.668 ; 1.247,30.906 -0.277,31.414 ; 1.247,31.922 -0.277,31.414 ; 2.246,31.414 -0.277,31.414 ; 5,34.5 14.896,34.5 ; 5.5,39 27.396,39 ; 12.2,31.414 14.723,31.414 ; 13.199,30.906 14.723,31.414 ; 13.199,31.922 14.723,31.414 ; 13.372,33.992 14.896,34.5 ; 13.372,35.008 14.896,34.5 ; 14.723,31.16 14.723,31.668 ; 14.896,34.246 14.896,34.754 ; 25.872,38.492 27.396,39 ; 25.872,39.508 27.396,39 ; 27.396,38.746 27.396,39.254
  text "54 (mm)" at -4.454,38.086 h1.52
  text "30 (mm)" at -4.954,33.586 h1.52
  text "15 (mm)" at 2.5,30.5 h1.52
  text "V14" at 2.408,26.812 h0.76 r180
  text "V15" at -1.308,26.676 h0.76 r180
  text "V16" at -9.713,24.918 h0.76 r210
  text "V13" at 10.336,24.544 h0.76 r165
  text "24V" at -13.862,22.782 h0.76 r220
  text "V12" at 13.823,22.733 h0.76 r150
  text "V11" at 19.928,17.707 h0.76 r130
  text "24V" at -20.074,17.584 h0.76 r235
  text "V10" at 22.049,14.981 h0.76 r130
  text "24V" at -22.234,14.443 h0.76 r235
  text "24V" at -12.862,13.313 h0.76 r235
  text "24V" at -15.745,9.32 h0.76 r235
  text "V9" at 25.451,7.474 h0.76 r105
  text "24V" at -18.055,5.919 h0.76 r235
  text "V8" at 26.363,3.253 h0.76 r100
  text "V7" at 26.267,-4.313 h0.76 r80
  text "V6" at 25.456,-8.117 h0.76 r75
  text "3V3" at -23.801,-11.433 h0.76 r295
  text "485A" at -22.227,-14.708 h0.76 r315
  text "V5" at 21.43,-15.492 h0.76 r60
  text "V4" at 18.164,-19.148 h0.76 r45
  text "485B" at -16.455,-21.36 h0.76 r330
  text "GND" at -12.657,-23.582 h0.76 r330
  text "V3" at 11.556,-23.994 h0.76 r30
  text "V2" at 8.287,-25.455 h0.76 r30
  text "24V" at -4.822,-25.912 h0.76 r345
  text "V1" at 1.051,-26.589 h0.76 r25
Bottom Overlay:
  circle w0.203: c0.003,-0.003 r17.5
  text "2018-6-15" at 9.848,10.248 h0.76 r330
  text "CircleValve V2.0" at 12.49,10.224 h0.76 r330
Top Solder:
  region: -12.31,-13.881 -10.686,-14.818 -5.624,-6.05 -7.248,-5.112
Bottom Solder:
  region: -11.514,-12.002 -9.392,-13.227 -6.705,-8.572 -8.827,-7.347